# Altium PCB PCB1.PcbDoc
Units mm, origin at the board's own origin, x right, y up, seen from the top; angles counter-clockwise.
Board outline 58.4 x 25.12 mm, 2 copper layers (Top Layer, Bottom Layer); 12 components, 13 nets, 36 pads, 0 vias.
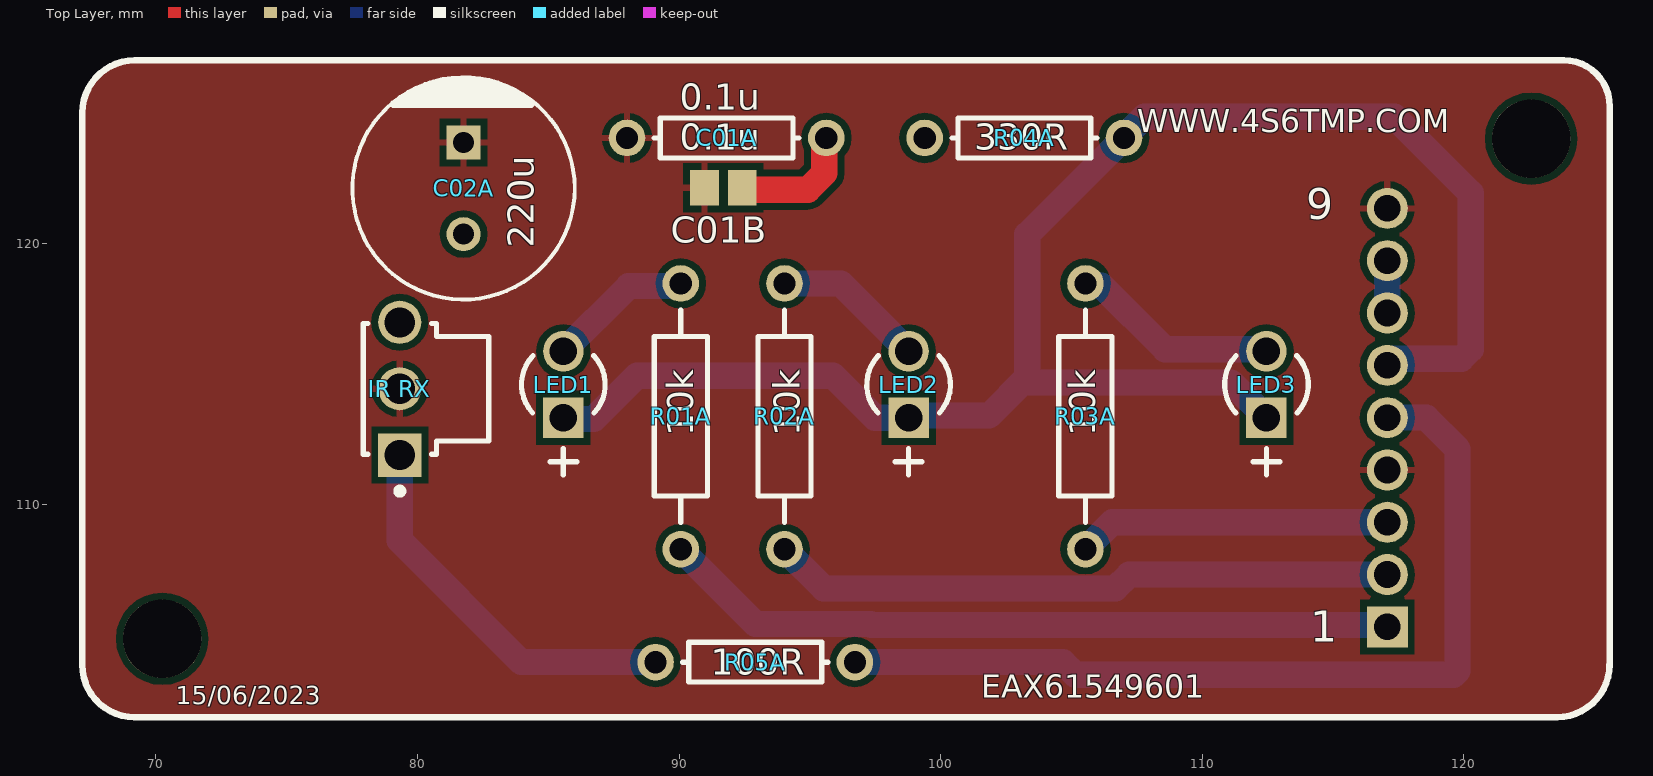
[diagram p0: Top Layer view]
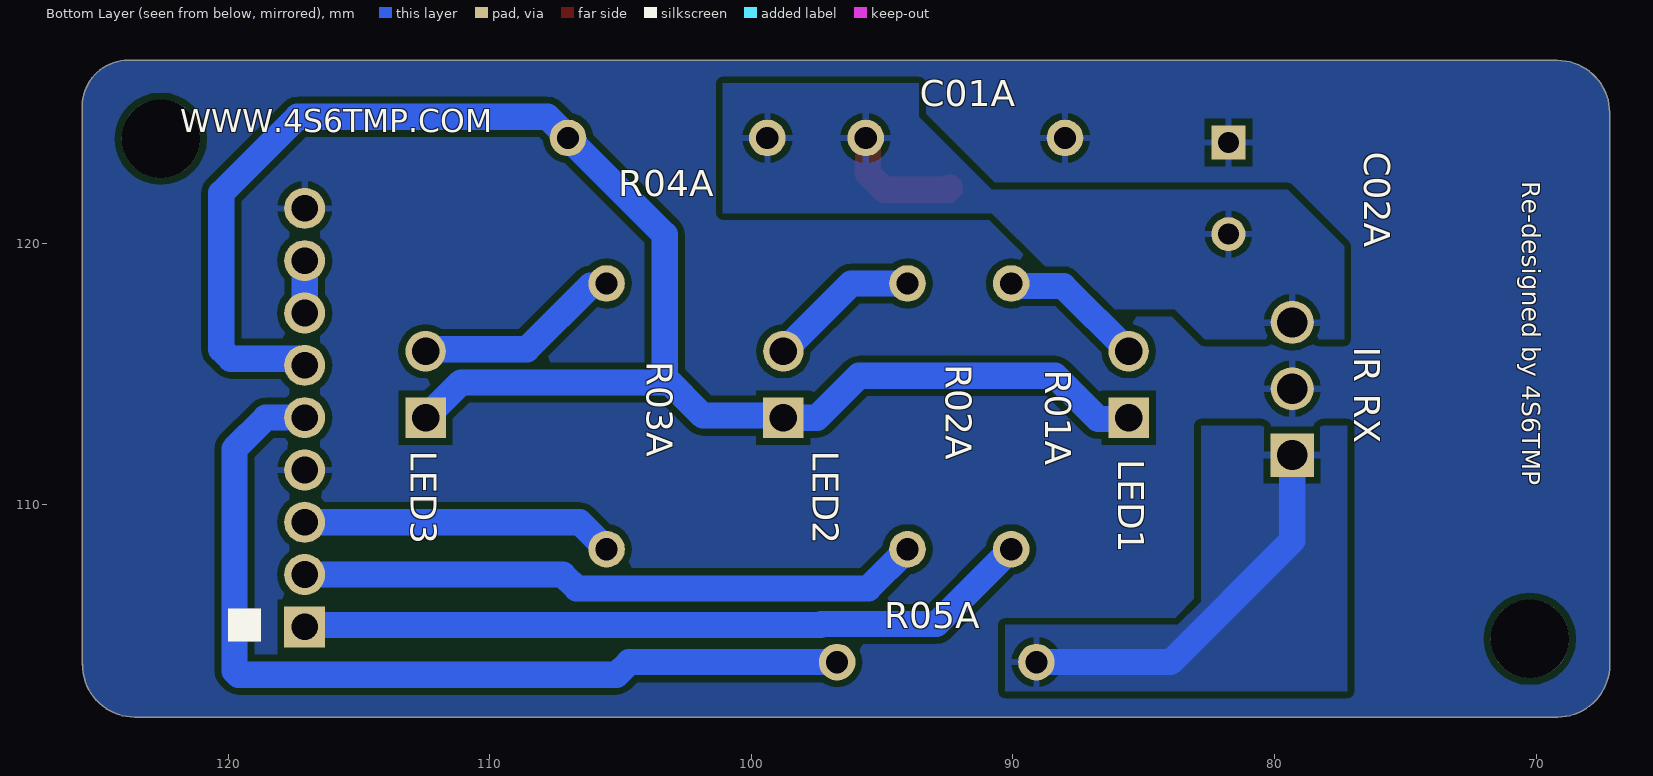
[diagram p1: Bottom Layer view, seen from below]

## Layer stack, top to bottom
Top Solder: solder mask 0.0102, Solder Resist, Dk 3.5
Top Layer: signal copper 0.0356
Dielectric 1: dielectric 0.32, FR-4, Dk 4.8
Bottom Layer: signal copper 0.0356
Bottom Solder: solder mask 0.0102, Solder Resist, Dk 3.5

## Board outline
69.183,101.886 cw(c69.183,103.886) 67.183,103.886 67.183,125.019 67.19,124.993 cw(c69.19,124.993) 69.19,126.993 69.215,127 123.82,127 cw(c123.82,125.236) 125.584,125.236 125.578,125.234 125.578,124.993 125.578,103.861 125.571,103.886 cw(c123.571,103.886) 123.571,101.886 123.571,101.879

## Design rules (kind name [scope] priority, off if disabled: settings)
Clearance [All] p1: gap=0.254 ignorepadtopadclearanceinfootprint=FALSE except(0: Arc-Hole Track-Hole SMDPad-Hole THPad-Hole Via-Hole Fill-Hole Poly-Hole Region-Hole Text-Hole)
PolygonConnect [All] p1: connectstyle=Relief reliefconductorwidth=0.254 reliefentries=4 polygonreliefangle="90 Angle" airgapwidth=0.254
RoutingVias [All] p1: holewidth=0.711 width=1.27 viastyle="Through Hole" minholewidth=0.711 minwidth=1.27 maxholewidth=0.711 maxwidth=1.27
SolderMaskExpansion [All] p1: expansion=0.102 istentingtop=FALSE
Width [All] p1: maxlimit=3 minlimit=0.254 preferedwidth=1
30 further rules are at their usual default settings.

## Components (designator, comment, footprint, x,y, rotation, side; value= is the part's Value field where it differs from the comment)
C01A "0.1u" AXIAL-0.3 91.821,124.028 r0 top
C01B "0.1u" CAPC2013X145X48LL20T23 91.694,122.123 r0 top
C02A "220u" FP-EEU-FC1V221L-MFG 81.763,122.1 r270 top
"IR RX" "Comment" VISH-TSOP38238 79.324,114.439 r90 top
LED1 "Comment" KING-L-934GD 85.578,114.6 r90 top
LED2 "Comment" KING-L-934GD 98.778,114.6 r90 top
LED3 "Comment" KING-L-934GD 112.458,114.6 r90 top
R01A "10k" AXIAL-0.4 90.068,113.386 r90 top
R02A "10k" AXIAL-0.4 94.031,113.386 r90 top
R03A "10k" AXIAL-0.4 105.537,113.386 r90 top
R04A "330R" AXIAL-0.3 103.2,124.028 r0 top
R05A "100R" AXIAL-0.3 92.913,103.988 r0 top

## Footprints (in the part's own frame and the unit in brackets; to place one, negate y for a bottom-side part, rotate by r counter-clockwise, add the part's x,y. Pads: shape width x height; smd on the part's side, far side on the other; paste and mask are expansions set on the pad)
AXIAL-0.3 [mm] "Axial Device, Thru-Hole; 2 Leads; 0.3 in Pin Spacing"
  round 1.4 hole 0.85: 1(-3.81,0) 2(3.81,0)
  silkscreen extent -2.77,-0.76 2.77,0.76
AXIAL-0.4 [mm] "Axial Device, Thru-Hole; 2 Leads; 0.4 in Pin Spacing"
  round 1.4 hole 0.85: 1(-5.08,0) 2(5.08,0)
  silkscreen extent -4.06,-1.02 4.06,1.02
CAPC2013X145X48LL20T23 [mm] "Chip Capacitor, 2-Leads, Body 2.00x1.25mm, IPC High Density"
  rect 1.1x1.35 smd: 1(-0.725,0) 2(0.725,0)
  body extent -1.1,-0.72 1.1,0.72, height 1.45
FP-EEU-FC1V221L-MFG [mm]
  rect 1.3x1.3 hole 0.8 paste-1000 mask+0: 1(-1.75,0)
  round 1.3 hole 0.8 paste-1000 mask+0: 2(1.75,0)
  silkscreen extent -4.25,-4.25 4.25,4.25, body extent -4.35,-4.35 4.35,4.35, height 0.25
KING-L-934GD [mm] "THD, 2-Leads, Dia 3.2mm, Body Length 4.9mm"
  rect 1.55x1.55 hole 1.05: 1(-1.27,0)
  round 1.55 hole 1.05: 2(1.27,0)
  silkscreen extent -3.46,-1.6 1.1,1.6
VISH-TSOP38238 [mm] "TH, 3-Leads, Body 5.00x4.80mm, Pitch 2.54mm"
  rect 1.65x1.65 hole 1.15: 1(-2.54,0)
  round 1.65 hole 1.15: 2(0,0) 3(2.54,0)
  silkscreen extent -4.04,-3.4 2.5,1.4, body extent -2.89,-3.4 2.89,1.4, height 8.55

## Free pads (board coordinates)
  rect 1.57x1.57 hole 1.02: 1(117.078,105.335)
  round 3 hole 3: 2(70.241,104.879) 2(122.578,124)
  round 1.57 hole 1.02: 2(117.078,107.335) 3(117.078,109.335) 4(117.078,111.335) 5(117.078,113.335) 6(117.078,115.335) 7(117.078,117.335) 8(117.078,119.335) 9(117.078,121.335)

## Nets (pads, with @x,y where several pads share a name; then routed paths per layer and width w, separated by ;. In a path a pad name is that pad's centre, name@x,y a point inside that pad or via, vN(x,y) a via of type N, cw(c..) or ccw(c..) an arc to the next point about the centre after c; other vN are vias at no path point)
c01a-2: "IR RX.3" C01A.2 C01B.2 C02A.2 R04A.1 | length 4.9
  Top Layer w0.254: R04A.1 R04A.1@99.441,124.079
  Top Layer w1: C01B.2 92.419,122.097 92.469,122.047 94.918,122.047 95.554,122.683 95.554,124.002 C01A.2@95.631,124.079
data5: pad.1 R01A.1 | length 28.2
  Bottom Layer w1: R01A.1 92.932,105.442 97.325,105.442 97.357,105.41 117.003,105.41 pad.1
data6: pad.2@117.078,107.335 R02A.1 | length 23.9
  Bottom Layer w1: R02A.1@94.107,108.331 94.107,108.229 95.529,106.807 106.68,106.807 107.208,107.335 pad.2@117.078,107.335
data7: pad.3 R03A.1 | length 11.6
  Bottom Layer w1: R03A.1@105.791,108.585 105.816,108.585 106.566,109.335 pad.3
GND: "IR RX.2" C01A.1 C01B.1 C02A.1 pad.4 pad.9
R01a-2: LED1.2 R01A.2 | length 5.5
  Bottom Layer w1: LED1.2 88.072,118.364 R01A.2@90.043,118.364
r02a-2: LED2.2 R02A.2 | length 5.7
  Bottom Layer w1: R02A.2 96.182,118.466 98.679,115.969 LED2.2@98.679,115.951
r03a-2: LED3.2 R03A.2 | length 8
  Bottom Layer w1: R03A.2 105.614,118.389 106.147,118.389 108.585,115.951 112.377,115.951 LED3.2
r04a-2: 
r05a-1-1: "IR RX.1" R05A.1 | length 15.1
  Bottom Layer w1: 79.324,111.899 79.324,108.636 83.972,103.988 89.002,103.988 R05A.1@89.154,104.14
tact: pad.7 pad.8 | length 2
  Bottom Layer w1: pad.8 117.078,117.364 pad.7@117.094,117.348
VCC: LED1.1 LED2.1 LED3.1 pad.6 R04A.2 | length 64.3
  Bottom Layer w1: LED1.1@85.852,113.284 86.741,113.284 88.392,114.935 95.885,114.935 97.49,113.33 LED2.1 ; LED2.1@98.806,113.411 101.854,113.411 103.314,114.871 103.314,120.332 R04A.2@107.061,124.079 ; 103.124,114.681 111.107,114.681 LED3.1 ; R04A.2 107.01,124.055 107.796,124.841 117.348,124.841 120.269,121.92 120.269,115.951 119.905,115.587 117.33,115.587 pad.6
vout: pad.5 R05A.2 | length 34.8
  Bottom Layer w1: R05A.2@96.926,103.988 104.673,103.988 105.156,103.505 119.612,103.505 119.761,103.654 119.761,112.141 118.567,113.335 pad.5

## Polygon pours and split planes (outlines as drawn)
GND on Bottom Layer "Top Layer-No Net1" (solid, remove dead copper, pour order 4): 69.183,101.886 cw(c69.183,103.886) 67.183,103.886 67.183,125.019 67.19,124.993 cw(c69.19,124.993) 69.19,126.993 69.215,127 123.82,127 cw(c123.82,125.236) 125.584,125.236 125.578,125.234 125.578,124.993 125.578,103.861 125.571,103.886 cw(c123.571,103.886) 123.571,101.886 123.571,101.879
c01a-2 on Bottom Layer "C01A-2_L02_P001" (solid, pour order 1): 81.153,116.332 77.343,116.332 77.343,119.888 79.502,122.047 90.805,122.047 93.599,124.841 93.599,126.111 101.092,126.111 101.092,121.158 90.805,121.158 87.122,117.475 83.82,117.475 82.677,116.332
r05a-1-1 on Bottom Layer "R05A-1-1_L02_P003" (solid, remove dead copper, pour order 3): 82.804,113.03 82.804,106.299 83.693,105.41 90.297,105.41 90.297,102.87 77.216,102.87 77.216,113.03
GND on Top Layer "Top Layer-No Net" (solid, pour order 0): 69.183,101.886 cw(c69.183,103.886) 67.183,103.886 67.183,125.019 67.19,124.993 cw(c69.19,124.993) 69.19,126.993 69.215,127 123.82,127 cw(c123.82,125.236) 125.584,125.236 125.578,125.234 125.578,124.993 125.578,103.861 125.571,103.886 cw(c123.571,103.886) 123.571,101.886 123.571,101.879

## Silkscreen, mask and mechanical layers (free items; w line width, h text height)
Top Overlay:
  lines w0.254: 67.183,103.81 67.183,125.019 ; 67.183,103.886 ccw(c69.183,103.886) 69.183,101.886 ; 67.19,124.993 cw(c69.19,124.993) 69.19,126.993 ; 69.19,101.879 123.571,101.879 ; 69.215,127 123.82,127 cw(c123.82,125.236) 125.584,125.236 ; 79.07,125.298 84.353,125.298 ; 79.426,125.578 84.074,125.578 ; 79.438,125.588 84.086,125.588 ; 79.715,125.759 83.82,125.759 ; 80.096,125.937 83.414,125.937 ; 80.477,126.089 83.033,126.089 ; 81.062,126.216 82.474,126.216 ; 123.571,101.886 ccw(c123.571,103.886) 125.571,103.886 ; 125.578,103.861 125.578,124.968 ; 125.578,124.993 125.578,125.234
  text "WWW.4S6TMP.COM" at 107.524,123.964 h1.5
  text "9" at 113.973,120.518 h2.03
  text "1" at 114.134,104.374 h2.03
  text "EAX61549601" at 101.559,102.331 h1.5
  text "15/06/2023" at 70.756,102.143 h1.2
Bottom Overlay:
  rectangle: 118.745,104.775 120.015,106.045
  text "WWW.4S6TMP.COM" at 121.838,123.964 h1.5
  text "Re-designed by 4S6TMP" at 70.752,122.376 h1.2 r90
Mechanical 1:
  the board outline again, w0.3